# Altium PCB BLE112_Module.PcbDoc
Units mm, origin at the board's own origin, x right, y up, seen from the top; angles counter-clockwise.
Board outline 30.48 x 38.1 mm, 2 copper layers (Top Layer, Bottom Layer); 28 components, 33 nets, 125 pads, 20 vias.
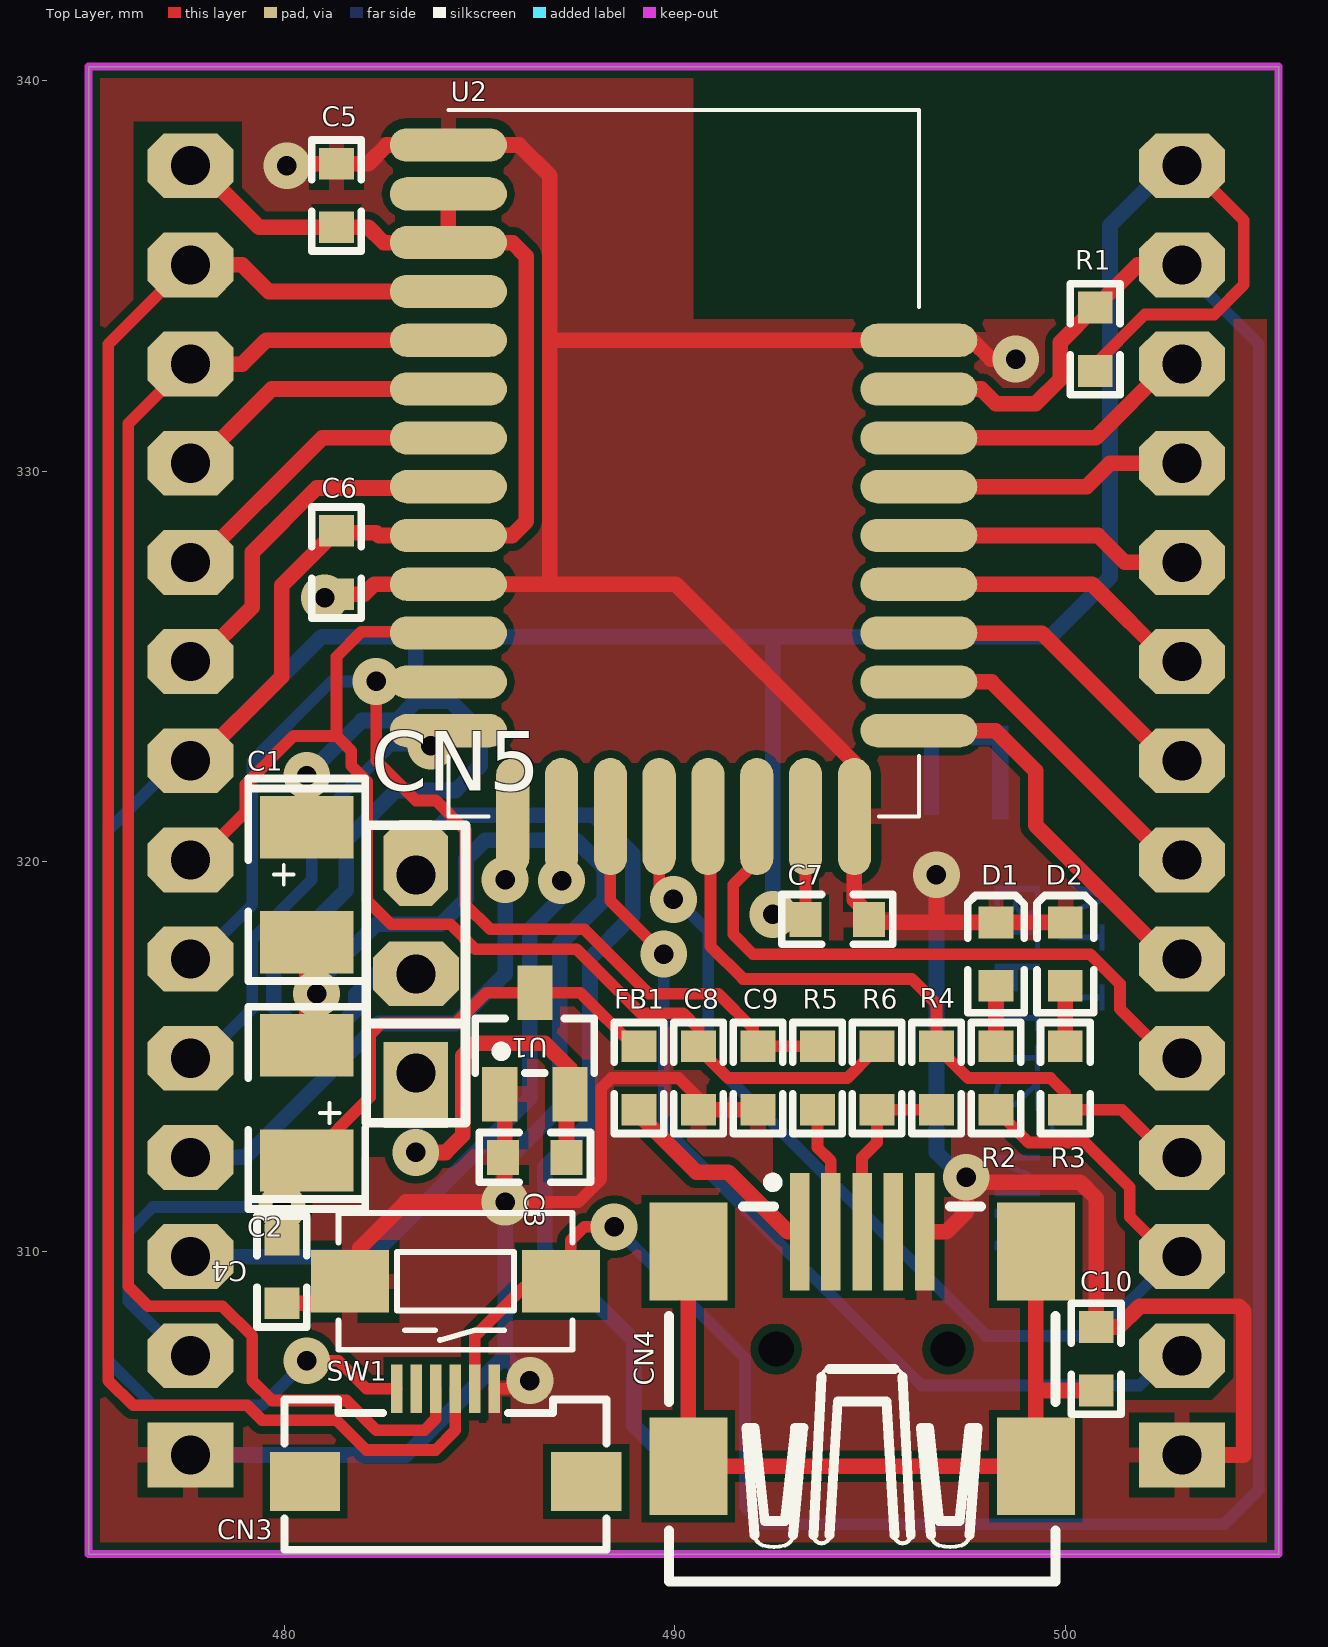
[diagram p0: Top Layer view]
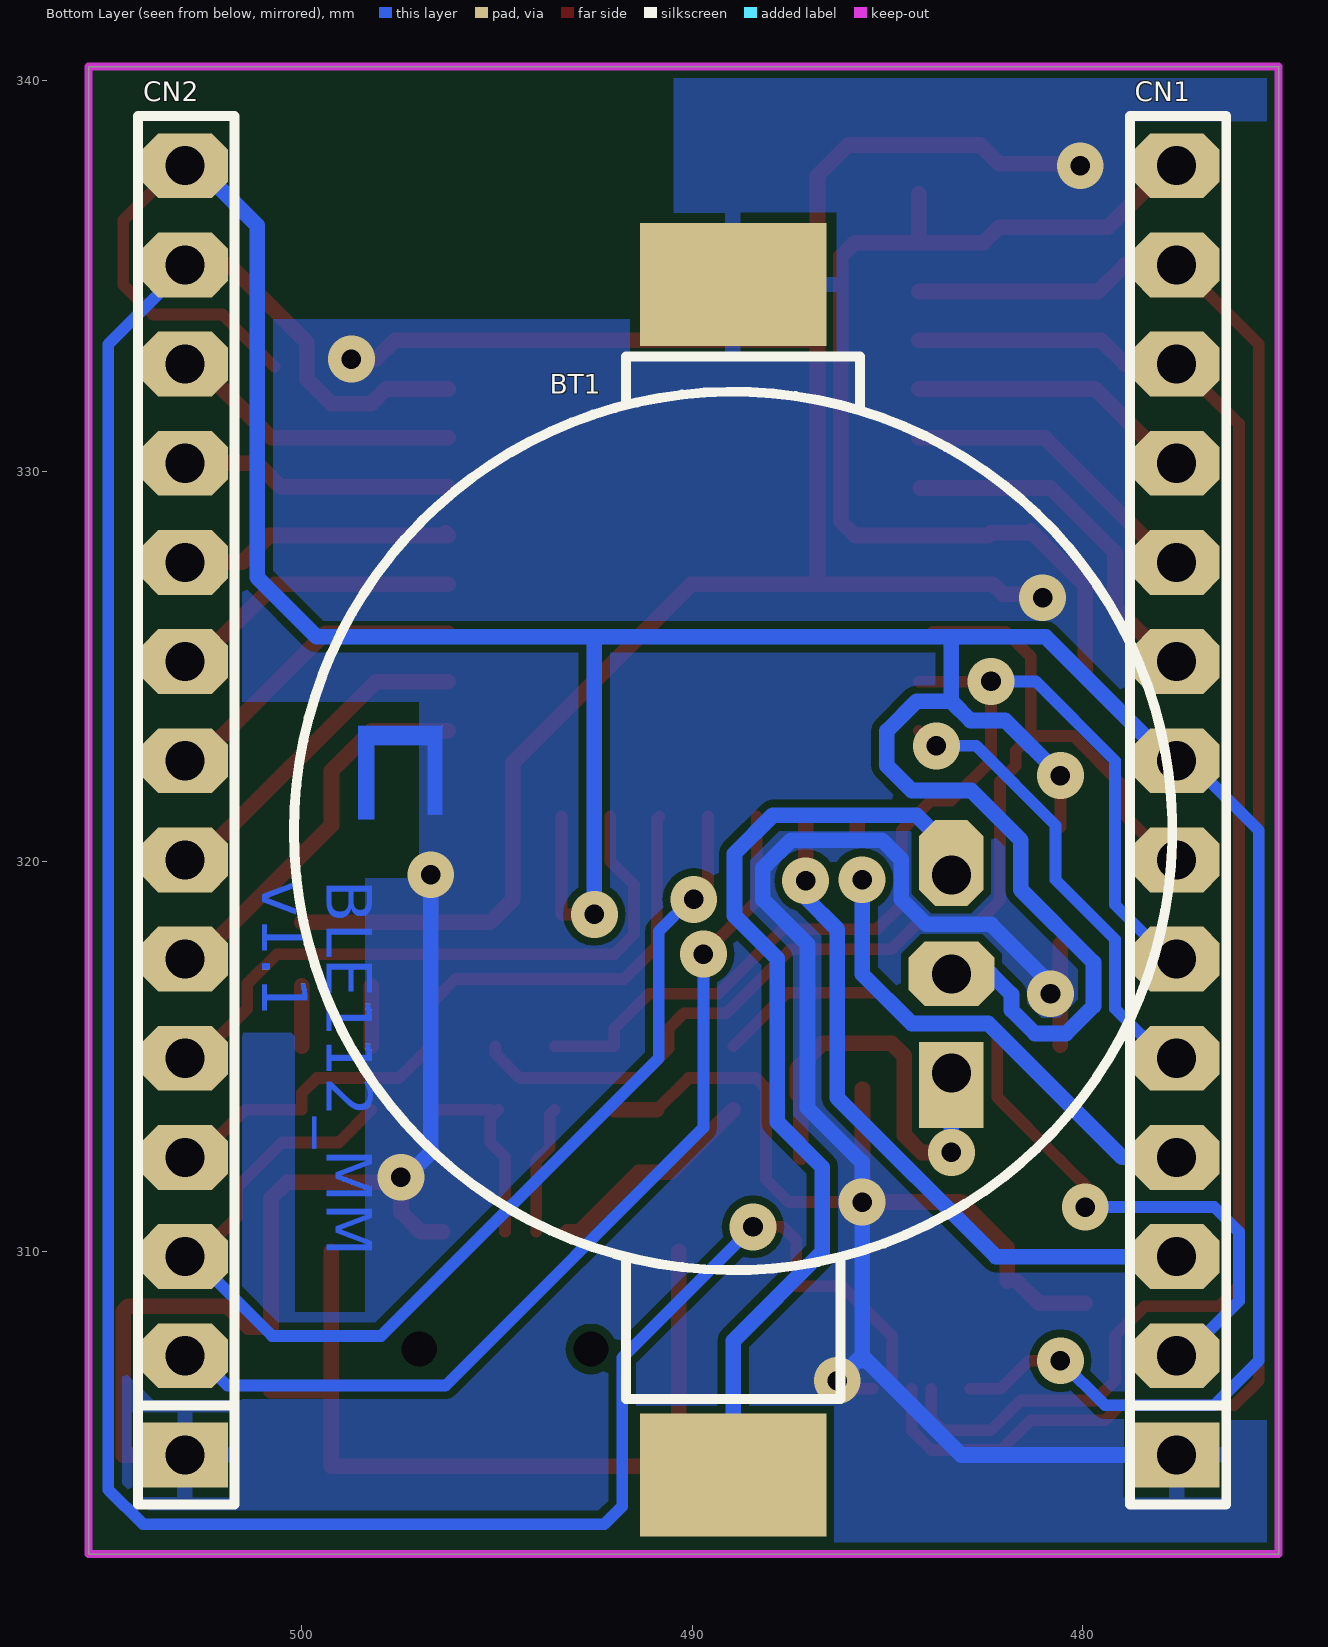
[diagram p1: Bottom Layer view, seen from below]
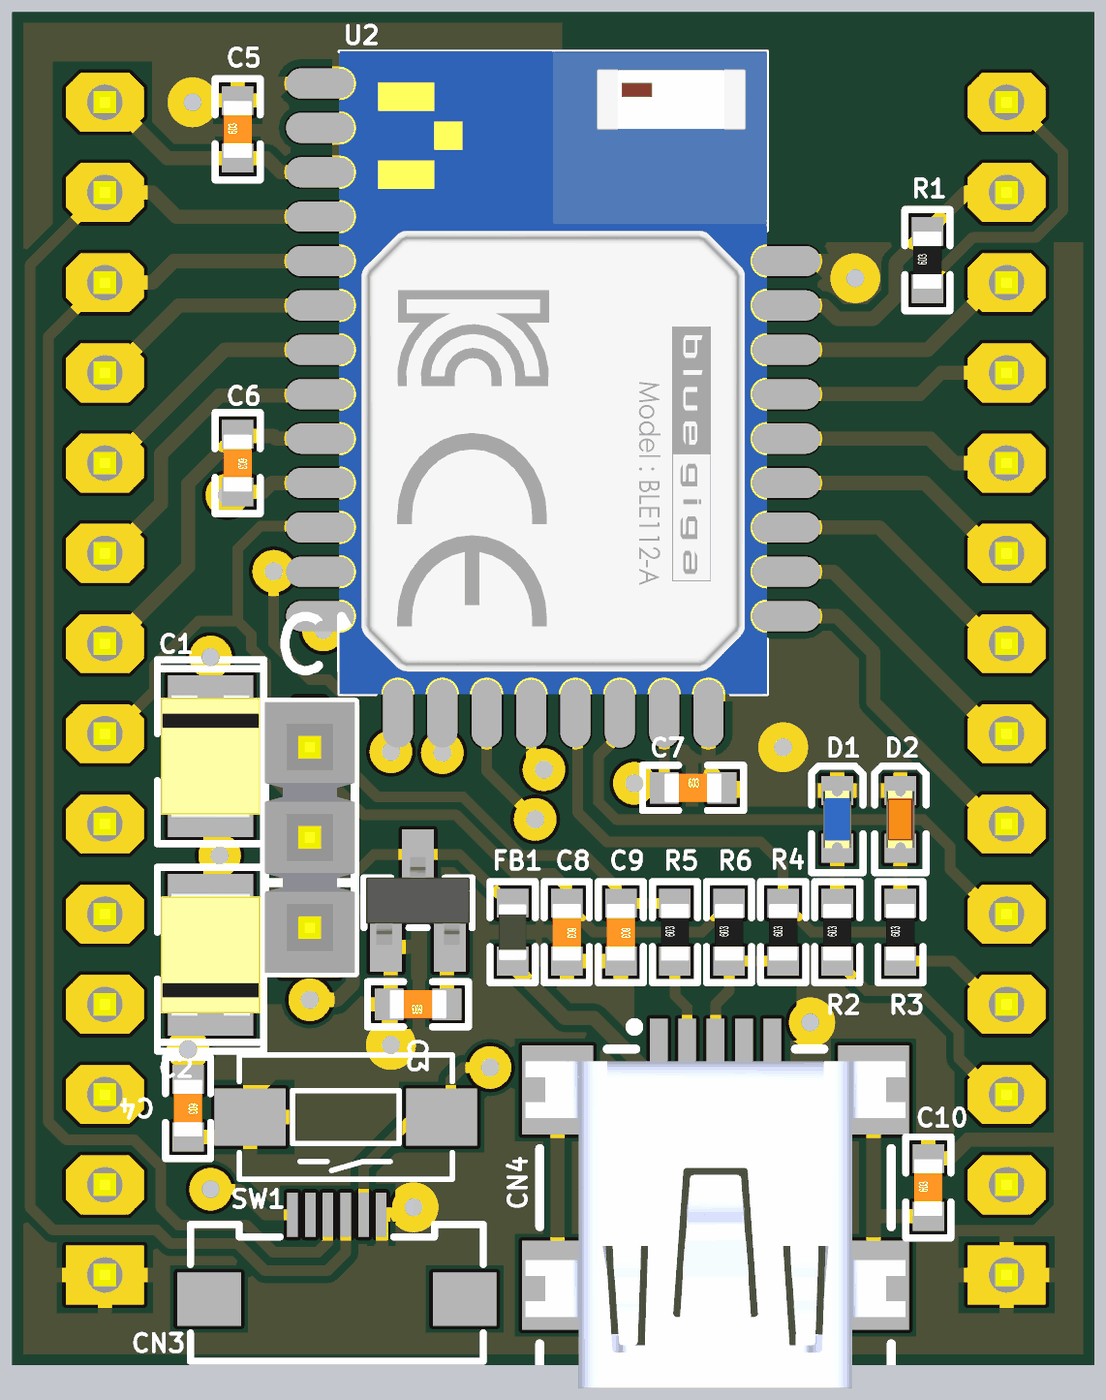
[diagram p2: 3D render of the assembled board from above, using the file's embedded part models]
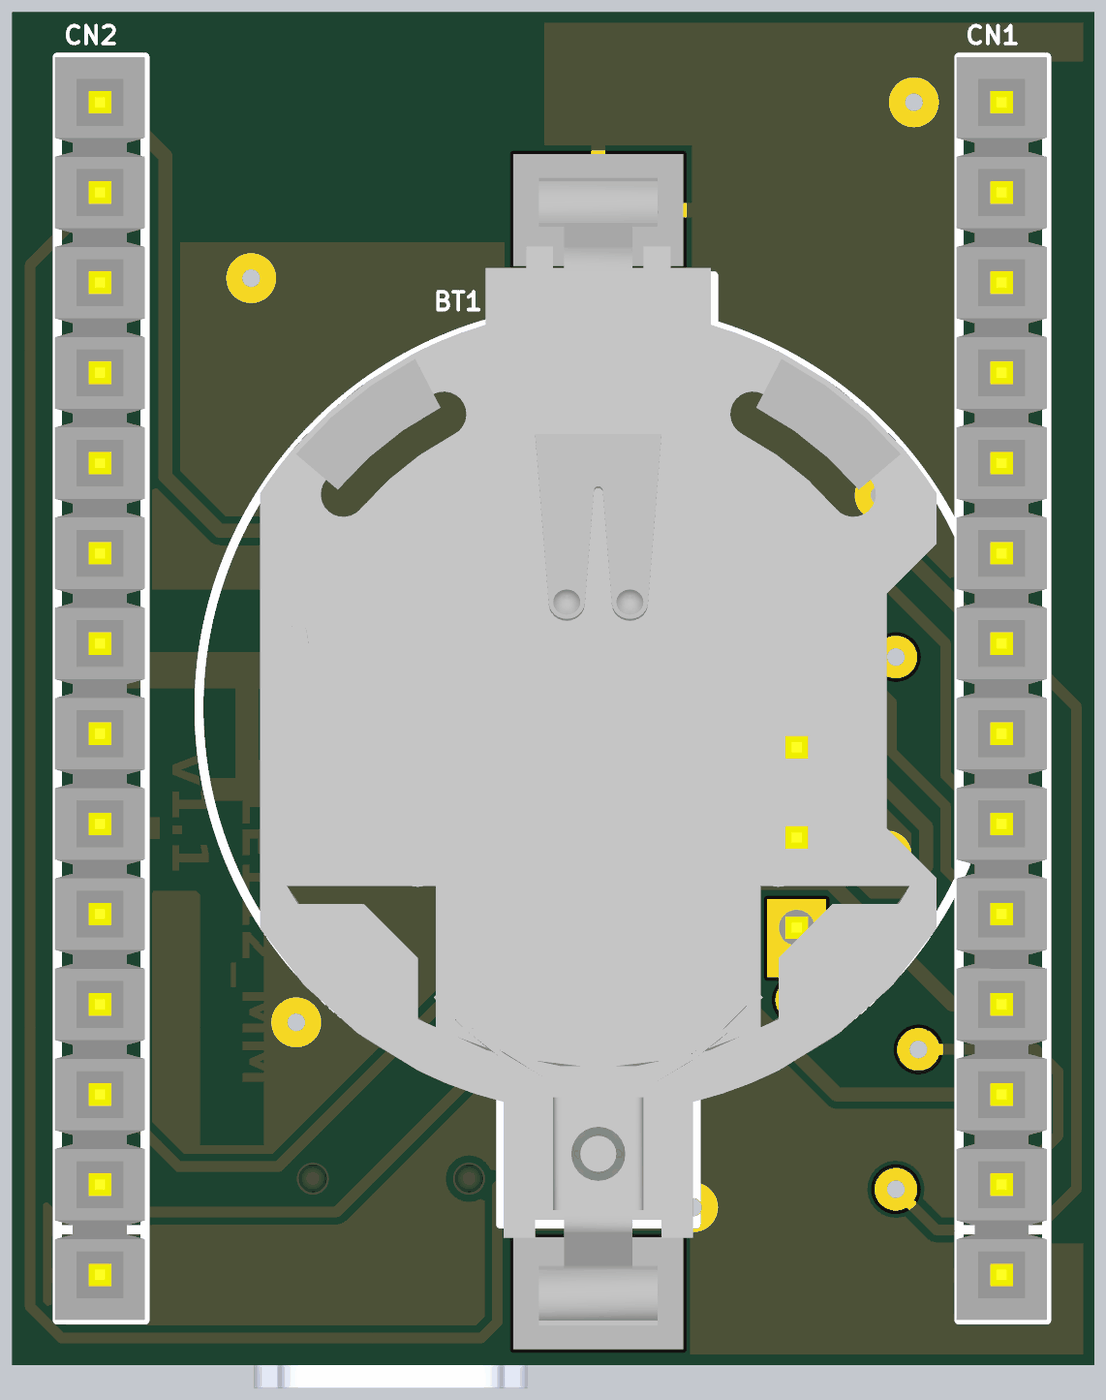
[diagram p3: 3D render of the assembled board from below, using the file's embedded part models]

## Layer stack, top to bottom
Top Solder: solder mask 0.0102, Solder Resist, Dk 3.5
Top Layer: signal copper 0.0356
Dielectric1: dielectric 0.32, FR-4, Dk 4.8
Bottom Layer: signal copper 0.0356
Bottom Solder: solder mask 0.0102, Solder Resist, Dk 3.5

## Board outline
474.98,302.26 505.46,302.26 505.46,340.36 474.98,340.36

## Design rules (kind name [scope] priority, off if disabled: settings)
Clearance [IsText vs InPolygon] p1: gap=0
Clearance Clearance_2 [All vs InPolygon] p2: gap=0.2
Clearance Clearance_1 [All] p3: gap=0.2
ComponentClearance [All] p1: gap=0 collisioncheckmode=3 verticalgap=0 showdistances=TRUE
FabricationTestPointUsage TestPointUsage [All] p1: valid=0 allowmultiple=FALSE
FabricationTestpoint Testpoint [All] p1: side=3 testpointundercomponent=TRUE minsize=1.016 maxsize=2.54 preferedsize=1.524 minholesize=0 maxholesize=1.016 preferedholesize=0.813 testpointgrid=0.025 allowsidetop=TRUE allowsidebottom=TRUE usegrid=TRUE gridtolerance=0
PolygonConnect [All vs IsVia] p1: connectstyle=Direct reliefconductorwidth=0.4 reliefentries=4 polygonreliefangle="90 Angle" airgapwidth=0.254
PolygonConnect PolygonConnect_1 [All] p2: connectstyle=Relief reliefconductorwidth=0.4 reliefentries=4 polygonreliefangle="90 Angle" airgapwidth=0.254
RoomDefinition BLE112_Module [InComponentClass('BLE112_Module')] p1: confinementstyle=ConfineIn formatcopy=TRUE lockcomponents=FALSE outline 408.026,268.529 774.268,268.529 774.268,358.978 408.026,358.978
RoutingVias [All] p1: holewidth=0.5 width=1.2 viastyle="Through Hole" minholewidth=0.5 minwidth=1.2 maxholewidth=0.5 maxwidth=1.2
SolderMaskExpansion [All] p1: expansion=0.102
Width [All] p1: maxlimit=1 minlimit=0.25 preferedwidth=0.5 minimp=50.000000 maximp=50.000000 favimp=50.000000
27 further rules are at their usual default settings.

## Components (designator, comment, footprint, x,y, rotation, side; value= is the part's Value field where it differs from the comment)
BT1 "796136-1 Battery Holder" 796136-1 488.95,319.532 r90 bottom locked
C1 "" SMDB 480.568,319.405 r90 top
C2 "" SMDB 480.568,313.817 r270 top
C3 "100nF" C0603 486.41,312.42 r180 top
C4 "100nF" C0603 479.933,309.499 r270 top
C5 "1uF" C0603 481.33,337.058 r90 top
C6 "1uF" C0603 481.33,327.66 r270 top
C7 "1uF" C0603 494.157,318.516 r0 top
C8 "47pF" C0603 490.601,314.452 r270 top
C9 "47pF" C0603 492.125,314.452 r270 top
C10 "10n" C0603 500.786,307.264 r90 top
CN1 "CN_14x1" GP_14x1 477.59,304.8 r90 bottom
CN2 "CN_14x1" GP_14x1 502.99,304.8 r90 bottom
CN3 "JOINT TECH F0500WR-S-06PT" F0500WR-S-06PT 484.124,305.308 r0 top
CN4 "USB MINI-B" "USB-MINI-B SMD" 494.792,302.26 r270 top
CN5 "CN_3x1" GP_3x1 483.362,314.579 r90 top
D1 "LED" LED0603B 498.221,317.627 r90 top
D2 "LED" LED0603R 499.999,317.627 r90 top
FB1 "600R, 1A" FB0603 489.077,314.452 r270 top
R1 "10k" R0603 500.761,333.375 r90 top
R2 "470R" R0603 498.221,314.452 r90 top
R3 "470R" R0603 499.999,314.452 r90 top
R4 "1k5" R0603 496.697,314.452 r90 top
R5 "33R" R0603 493.649,314.452 r90 top
R6 "33R" R0603 495.173,314.452 r90 top
SW1 "DTSM31N" DTSM-3 484.378,309.245 r180 top
U1 "MCP1700T-3002E/TT" SOT-23 486.41,315.341 r0 top
U2 "BLE112-A-v1" BLE112-X 490.22,330.2 r0 top

## Footprints (in the part's own frame and the unit in brackets; to place one, negate y for a bottom-side part, rotate by r counter-clockwise, add the part's x,y. Pads: shape width x height; smd on the part's side, far side on the other; paste and mask are expansions set on the pad)
796136-1 [mm] "Tyco Electronics 796136-1 CR2032 SMD Battery Holder"
  rect 3.15x4.78 smd: 1(-15.25,0) 2(15.25,0)
  silkscreen extent -13.3,-11.25 13.4,11.25, body extent -16.16,-9.52 16.16,9.53, height 6.52
BLE112-X [mm] "Bluegiga BLE112 Bluetooth Low Energy Single Mode Module"
  oval 3x0.85 smd mask+0.05: 1(-6.025,8.15) 2(-6.025,6.9) 3(-6.025,5.65) 4(-6.025,4.4) 5(-6.025,3.15) 6(-6.025,1.9) 7(-6.025,0.65) 8(-6.025,-0.6) 9(-6.025,-1.85) 10(-6.025,-3.1) 11(-6.025,-4.35) 12(-6.025,-5.6) 13(-6.025,-6.85) 22(6.025,-6.85) 23(6.025,-5.6) 24(6.025,-4.35) 25(6.025,-3.1) 26(6.025,-1.85) 27(6.025,-0.6) 28(6.025,0.65) 29(6.025,1.9) 30(6.025,3.15)
  oval 0.85x3 smd mask+0.05: 14(-4.375,-9.05) 15(-3.125,-9.05) 16(-1.875,-9.05) 17(-0.625,-9.05) 18(0.625,-9.05) 19(1.875,-9.05) 20(3.125,-9.05) 21(4.375,-9.05)
  silkscreen extent -6.02,-9.05 6.02,9.05, body extent -6.02,-9.05 6.03,9.05, height 2.3
C0603 [mil]
  rect 32x35 smd: 1(32,0) 2(-32,0)
  silkscreen extent -56,-25 56,25, body extent -31,-16 32,16, height 12
DTSM-3 [mm]
  rect 2x1.6 smd: 1(-2.7,0) 2(2.7,0)
  silkscreen extent -3,-1.75 3,1.75, body extent -3.6,-1.75 3.6,1.75, height 5
F0500WR-S-06PT [mm]
  rect 0.3x1.25 smd: 1(-1.25,1.188) 2(-0.75,1.188) 3(-0.25,1.188) 4(0.25,1.188) 5(0.75,1.188) 6(1.25,1.188)
  rect 1.8x1.5 smd: M1(-3.6,-1.187) M2(3.6,-1.187)
  silkscreen extent -4.13,-2.94 4.13,0.91, body extent -4.1,-2.9 4.1,1.4, height 2
FB0603 [mil]
  rect 32x35 smd: 1(32,0) 2(-32,0)
  silkscreen extent -56,-25 56,25, body extent -31,-16 32,16, height 35
GP_3x1 [mm]
  rect 2.2x1.651 hole 1 copper offset -0.3,0: 1(0,0)
  oct 1.651x2.2 hole 1: 2(2.54,0)
  oct 2.2x1.651 hole 1 copper offset 0.3,0: 3(5.08,0)
  silkscreen extent -1.27,-1.27 6.35,1.27, body extent -1.27,-1.27 6.35,1.27, height 8.38
GP_14x1 [mm]
  rect 1.66x2.2 hole 1: 1(0,0)
  oct 1.66x2.2 hole 1: 2(2.54,0) 3(5.08,0) 4(7.62,0) 5(10.16,0) 6(12.7,0) 7(15.24,0) 8(17.78,0) 9(20.32,0) 10(22.86,0) 11(25.4,0) 12(27.94,0) 13(30.48,0) 14(33.02,0)
  silkscreen extent -1.27,-1.27 34.29,1.2, body extent -1.27,-1.27 34.29,1.27, height 8.38
LED0603B [mil]
  rect 32x35 smd: 1(-32,0) 2(32,0)
  silkscreen extent -59,-29 59,29, body extent -32,-16 32,16, height 24
LED0603R [mil]
  rect 32x35 smd: 1(-32,0) 2(32,0)
  silkscreen extent -59,-29 59,29, body extent -32,-16 32,16, height 24
R0603 [mil]
  rect 32x35 smd: 1(32,0) 2(-32,0)
  silkscreen extent -56,-25 56,25, body extent -31,-16 32,16, height 12
SMDB [mm] "SMDB"
  rect 1.6x2.4 smd: 1(1.476,0) 2(-1.475,0)
  silkscreen extent -2.46,-1.5 2.72,1.5, body extent -1.75,-1.4 1.75,1.4, height 1.91
SOT-23 [mm]
  rect 0.9x1.4 smd: 1(-0.9,-1.3) 2(0.9,-1.3) 3(0,1.3)
  silkscreen extent -1.52,-0.76 1.52,0.64, body extent -1.46,-1.25 1.46,1.23, height 1
"USB-MINI-B SMD" [mm]
  rect 3x0.5 smd: 1(-8.255,-1.6) 2(-8.255,-0.8) 3(-8.255,0) 4(-8.255,0.8) 5(-8.255,1.6)
  rect 2.5x2 smd: 6(-7.75,4.45) 7(-2.25,4.45) 8(-7.75,-4.45) 9(-2.25,-4.45)
  round 0.6 hole 0.9 unplated: MH1(-5.25,2.2) MH2(-5.25,-2.2)
  silkscreen extent -9.65,-4.95 0.7,4.95, body extent -8.56,-5.35 0.64,5.35, height 3.95

## Part data
BT1: library part 796136-1, "Tyco Connectivity 796136-1 CR2032 Battery Holder"
C1 C2: library part "Cap Pol Tant", "Polarized Tantalum Capacitor"
C3 C4 C5 C6 C7 C8 C9 C10: library part Cap, "Capacitor"
CN3: "0.50mm Pitch FFC/FPC Connector, SMT, Right Angle, ZIF, Top Contact Style Receptacle, 6 Circuits"
CN4: "USB Mini-B Receptacle"
D1 D2: "Typical RED, GREEN, YELLOW, AMBER GaAs LED"
FB1: library part LCBA-601, "Ferrite Bead; Imp.@ 100MHz:600R; Mounting: SMD; 1A; Case: 0603"
R1 R2 R3 R4 R5 R6: library part Res, "Resistor"
SW1: "DIPTRONICS 6x3,5mm SMD Tactile SPST-NO Switch"
U1: "250mA, Low Voltage, Low Quiescent Current (1.6uA) LDO Voltage Regulator"
U2: "Bluetooth ®  low energy single mode module"

## Via types
v1: diameter 1.2, hole 0.5, Top Layer to Bottom Layer, 20 vias

## Nets (pads, with @x,y where several pads share a name; then routed paths per layer and width w, separated by ;. In a path a pad name is that pad's centre, name@x,y a point inside that pad or via, vN(x,y) a via of type N, cw(c..) or ccw(c..) an arc to the next point about the centre after c; other vN are vias at no path point)
3V3: C1.1 C5.2 C6.2 C7.2 CN1.8 CN1.14 CN2.14 CN3.1 CN5.2 R1.2 U2.2 U2.3 U2.9 U2.20 | length 134.9
  Top Layer w0.3: v1(480.568,307.213) 481.381,307.213 482.098,306.496 CN3.1 ; C1.1 v1(480.568,322.199) ; v1(492.506,318.643) 493.344,318.643 U2.20 ; R1.2@500.697,332.676 502.031,334.01 503.809,334.01 504.571,334.772 504.571,336.423 503.174,337.82 CN2.14@502.92,337.82
  Top Layer w0.4: CN1.8@477.52,322.58 477.774,322.58 479.933,324.739 479.933,327.076 C6.2 481.381,328.422 482.346,328.422 482.418,328.35 U2.9 485.83,328.35 486.191,328.711 486.191,335.496 485.837,335.85 U2.3 ; CN1.14@477.52,337.82 477.774,337.82 479.349,336.245 C5.2 482.143,336.245 482.538,335.85 U2.3 ; U2.2 U2.3
  Bottom Layer w0.3: CN1.8@477.774,322.58 477.266,322.58 475.488,320.802 475.488,307.213 476.631,306.07 479.425,306.07 v1(480.568,307.213)
  Bottom Layer w0.4: CN1.8@477.774,322.58 480.949,325.755 483.362,325.755 ; v1(480.568,322.199) 481.981,323.612 482.87,323.612 483.362,324.104 ; CN5.2 482.346,317.119 481.822,316.595 481.822,316.197 481.22,315.595 480.424,315.595 479.721,316.298 479.721,317.415 481.584,319.278 481.584,320.548 482.854,321.818 484.378,321.818 485.013,322.453 485.013,323.342 484.251,324.104 483.362,324.104 ; v1(492.506,318.643) 492.506,325.755 ; CN2.14@502.92,337.82 502.666,337.82 501.142,336.296 501.142,327.279 499.618,325.755 492.506,325.755 ; 483.362,324.104 483.362,325.755 ; 483.362,325.755 492.506,325.755
GND: BT1.2 C1.2 C2.2 C3.1 C4.1 C5.1 C6.1 C7.1 C8.1 C9.1 C10.1 CN1.1 CN2.1 CN3.6 CN4.5 D1.2 D2.2 SW1.2 U1.1 U2.1 U2.10 U2.21 U2.30 | length 139.4
  Top Layer w0.3: CN3.6 486.074,306.496 v1(486.283,306.705) ; v1@485.637,311.277 487.522,311.277 488.11,311.865 488.11,314.198 488.364,314.452 490.093,314.452 C8.1@490.906,313.639
  Top Layer w0.4: C4.1 481.119,308.686 SW1.2 ; v1(480.06,337.82) 480.111,337.871 C5.1 482.143,337.871 482.622,338.35 U2.1 486.007,338.35 486.791,337.566 486.791,333.375 ; C2.2 C1.2@480.568,317.881 ; v1@480.644,326.847 C6.1 482.041,326.847 482.294,327.1 U2.10 490.018,327.1 494.595,322.523 U2.21 494.595,319.018 495.173,318.44 496.697,318.44 ; SW1.2@481.932,309.245 481.932,310.101 483.108,311.277 485.394,311.277 v1@485.637,311.034 ; v1@485.637,311.277 U1.1@485.637,314.168 ; 486.791,327.1 486.791,333.375 ; C8.1@490.906,313.639 C9.1@491.998,313.639 ; CN4.5 496.951,310.515 497.459,311.023 497.459,311.785 497.586,311.912 v1(497.459,311.912) ; v1@496.697,319.405 496.697,318.44 ; v1@497.789,311.912 497.916,311.785 500.38,311.785 500.786,311.379 C10.1 501.371,308.077 501.904,308.61 504.444,308.61 504.571,308.483 504.571,304.8 CN2.1@502.92,304.8 ; v1@498.983,332.867 498.094,332.867 497.611,333.35 U2.30 486.816,333.35 486.791,333.375 ; D2.2 496.697,318.44 ; v1(497.459,311.912) 497.713,311.912 497.586,312.039 v1(497.459,311.912)
  Bottom Layer w0.4: CN1.1@477.52,304.8 483.108,304.8 485.648,307.34 v1(486.283,306.705) ; v1@480.885,316.928 482.346,318.389 483.997,318.389 484.648,319.04 484.648,320.056 485.14,320.548 487.466,320.548 487.508,320.507 487.51,320.507 488.096,319.921 488.096,319.919 488.188,319.826 488.188,319.024 487.045,317.881 487.045,313.69 485.648,312.293 v1(485.648,311.277) 485.648,307.213 ; v1@496.697,319.405 496.697,312.547 497.332,311.912 v1(497.459,311.912)
  other v1: 480.822,316.611 496.697,319.659 481.026,326.755 498.729,332.867
NetBT1_1: BT1.1 CN5.3 | length 25.3
  Bottom Layer w0.4: CN5.3 483.362,320.294 484.251,321.183 487.934,321.183 488.915,320.202 488.915,318.608 487.823,317.516 487.823,313.325 486.664,312.166 486.664,310.007 488.95,307.721 488.95,305.552 BT1.1@490.22,304.282
NetC3_2: C3.2 CN5.1 U1.2 | length 10.9
  Top Layer w0.4: v1(483.362,312.547) 484.124,312.547 484.568,312.991 484.568,315.024 484.886,315.341 486.664,315.341 487.31,314.695 U1.2 487.223,313.954 C3.2
  Bottom Layer w0.4: v1(483.362,312.547) CN5.1
NetC10_2: C10.2 CN4.6 CN4.7 CN4.8 CN4.9 | length 21.4
  Top Layer w0.4: CN4.8 CN4.9 CN4.7 499.242,306.451 ; CN4.6 499.242,306.451 ; C10.2 499.242,306.451
NetCN4_1: CN4.1 FB1.1 | length 5.5
  Top Layer w0.4: FB1.1@488.95,313.639 490.55,312.039 491.363,312.039 492.887,310.515 CN4.1
NetCN4_2: CN4.2 R5.2 | length 3.3
  Top Layer w0.3: R5.2@493.522,313.639 493.649,313.512 493.649,312.674 493.992,312.331 CN4.2
NetCN4_3: CN4.3 R4.2 R6.2 | length 4.9
  Top Layer w0.3: CN4.3 494.792,312.42 495.173,312.801 495.173,313.436 R6.2@494.97,313.639 ; R6.2 R4.2
NetD1_1: D1.1 R2.1 | length 1.5
  Top Layer w0.4: R2.1 D1.1
NetD2_1: D2.1 R3.1 | length 1.5
  Top Layer w0.4: R3.1 D2.1
P0_0: CN2.12 U2.28 | length 7.5
  Top Layer w0.4: U2.28 500.776,330.85 502.666,332.74 CN2.12@502.92,332.74
P0_1: CN2.11 U2.27 | length 6.9
  Top Layer w0.4: U2.27 500.542,329.6 501.142,330.2 CN2.11@502.92,330.2
P0_2: CN2.10 U2.26 | length 7.1
  Top Layer w0.4: U2.26@496.317,328.422 U2.26 500.833,328.35 501.523,327.66 CN2.10@502.92,327.66
P0_3: CN2.9 U2.25 | length 7.5
  Top Layer w0.4: U2.25 500.686,327.1 502.666,325.12 CN2.9@502.92,325.12
P0_4: CN2.8 U2.24 | length 8
  Top Layer w0.4: U2.24 499.396,325.85 502.666,322.58 CN2.8@502.92,322.58
P0_5: CN2.7 U2.23 | length 8.6
  Top Layer w0.4: U2.23 498.106,324.6 502.666,320.04 CN2.7@502.92,320.04
P0_6: CN2.6 U2.22 | length 9.9
  Top Layer w0.4: U2.22 498.213,323.35 499.237,322.326 499.237,320.929 502.666,317.5 CN2.6@502.92,317.5
P0_7: CN2.5 U2.19 | length 16.4
  Top Layer w0.3: U2.19 492.095,320.01 491.49,319.405 491.49,318.135 491.998,317.627 500.634,317.627 501.396,316.865 501.396,316.23 502.666,314.96 CN2.5@502.92,314.96
P1_0: CN2.4 R3.2 R4.1 U2.18 | length 18.5
  Top Layer w0.3: U2.18 490.908,321.087 490.908,318.114 490.908,317.828 491.744,316.992 496.062,316.992 496.697,316.357 R4.1 497.51,314.452 499.618,314.452 499.999,314.071 R3.2 501.447,313.639 502.666,312.42 CN2.4@502.92,312.42
P1_1: CN2.3 R2.2 U2.17 | length 29.7
  Top Layer w0.3: U2.17 489.595,319.39 v1(489.958,319.027) 489.89,319.027 489.839,319.078 v1@489.839,318.897 ; R2.2 499.059,312.801 500.507,312.801 501.65,311.658 501.65,310.896 502.666,309.88 CN2.3@502.92,309.88
  Bottom Layer w0.3: v1(489.958,319.027) 490.042,319.027 490.855,318.214 490.855,314.96 497.967,307.848 500.761,307.848 502.793,309.88 CN2.3
P1_2: CN2.2 U2.16 | length 24.8
  Top Layer w0.3: U2.16 488.345,318.994 v1(489.712,317.627)
  Bottom Layer w0.3: v1(489.712,317.627) 489.712,313.182 496.316,306.578 501.904,306.578 502.666,307.34 CN2.2@502.92,307.34
P1_3: CN1.3 U2.15 | length 18
  Top Layer w0.4: v1(487.096,319.507) U2.15
  Bottom Layer w0.4: CN1.3@477.52,309.88 CN1.3 482.219,309.88 486.283,313.944 486.283,318.262 487.096,319.075 v1(487.096,319.507)
P1_4: CN1.4 U2.14 | length 13.1
  Top Layer w0.4: U2.14@485.775,320.548 485.775,321.08 U2.14
  Bottom Layer w0.4: CN1.4@477.52,312.42 CN1.4 478.986,312.42 482.415,315.849 484.378,315.849 485.648,317.119 v1(485.648,319.532)
P1_5: CN1.5 U2.13 | length 12.4
  Top Layer w0.3: v1@483.461,322.616 U2.13
  Bottom Layer w0.3: CN1.5@477.52,314.96 477.901,314.96 479.171,316.23 479.171,318.008 480.695,319.532 480.695,320.929 482.727,322.961 v1(483.743,322.961)
P1_6: CN1.9 U2.8 | length 9.3
  Top Layer w0.3: CN1.9@477.52,325.12 CN1.9@477.774,325.12 ; U2.8@484.16,329.565 U2.8
  Top Layer w0.4: CN1.9@477.774,325.12 479.171,326.517 479.171,327.914 480.822,329.565 U2.8@484.16,329.565
P1_7: CN1.10 U2.7 | length 8
  Top Layer w0.3: CN1.10@477.52,327.66 CN1.10@477.774,327.66
  Top Layer w0.4: CN1.10@477.774,327.66 480.964,330.85 U2.7
P2_0: CN1.11 U2.6 | length 7.5
  Top Layer w0.3: CN1.11@477.52,330.2 CN1.11@477.774,330.2
  Top Layer w0.4: CN1.11@477.774,330.2 479.674,332.1 U2.6
P2_1: CN1.12 CN3.3 U2.5 | length 42.1
  Top Layer w0.3: CN1.12@477.52,332.74 475.996,331.216 475.996,309.118 476.504,308.61 478.409,308.61 479.171,307.848 479.171,306.705 479.679,306.197 481.584,306.197 482.346,305.435 483.583,305.435 483.874,305.726 CN3.3
  Top Layer w0.4: CN1.12@477.52,332.74 478.917,332.74 479.527,333.35 U2.5
P2_2: CN1.13 CN3.4 U2.4 | length 47.3
  Top Layer w0.3: CN1.13@477.52,335.28 475.488,333.248 475.488,306.705 476.123,306.07 479.044,306.07 479.425,305.689 481.33,305.689 482.092,304.927 483.87,304.927 484.374,305.431 CN3.4
  Top Layer w0.4: CN1.13@477.52,335.28 478.917,335.28 479.597,334.6 U2.4
RESET: CN2.13 CN3.5 R1.1 SW1.1 U2.29 | length 70.3
  Top Layer w0.3: CN3.5 484.874,307.836 486.156,309.118 487.332,309.118 487.332,310.294 487.68,310.642 ; 487.746,310.642 v1(488.442,310.642)
  Top Layer w0.4: U2.29 497.845,332.1 498.221,331.724 499.237,331.724 499.872,332.359 499.872,333.299 R1.1 501.853,335.28 CN2.13@502.92,335.28
  Bottom Layer w0.3: v1(488.442,310.642) 488.315,310.642 488.442,310.515 488.569,310.515 491.792,307.292 491.792,303.482 492.252,303.022 504.063,303.022 504.952,303.911 504.952,333.248 CN2.13@502.92,335.28
USB+: C8.2 CN1.7 R6.1 U2.11 | length 30.5
  Top Layer w0.3: CN1.7@477.52,320.04 477.774,320.04 478.993,321.259 478.993,321.97 480.238,323.215 481.33,323.215 ; U2.11@483.87,325.85 483.838,325.882 481.965,325.882 481.33,325.247 481.33,323.215 ; R6.1@495.046,315.265 495.046,315.087 494.411,314.452 491.363,314.452 490.601,315.214 490.601,315.722 490.212,316.111 489.124,316.111 487.481,317.754 484.886,317.754 484.251,318.389 482.727,318.389 482.118,318.998 482.118,322.046 481.711,322.453 481.711,322.834 481.33,323.215
USB-: C9.2 CN1.6 R5.1 U2.12 | length 29.4
  Top Layer w0.3: v1(482.346,324.612) 482.345,322.581 483.362,321.564 483.87,321.564 484.632,320.802 484.632,318.897 485.267,318.262 487.68,318.262 489.331,316.611 491.109,316.611 491.998,315.722 491.998,315.265 R5.1@493.522,315.265 ; v1@482.473,324.612 482.485,324.6 U2.12
  Bottom Layer w0.3: CN1.6@477.52,317.5 477.774,317.5 479.171,318.897 479.171,322.58 481.203,324.612 v1@482.473,324.612
VIN: C2.1 C4.2 CN1.2 FB1.2 U1.3 | length 21.1
  Top Layer w0.3: v1@479.655,311.428 C2.1 482.187,313.96 482.187,315.563 482.481,315.857 484.386,315.857 485.17,316.641 U1.3 487.574,316.641 FB1.2@488.95,315.265
  Bottom Layer w0.3: CN1.2 477.393,307.34 475.996,308.737 475.996,310.515 476.631,311.15 v1(479.933,311.15)
pads on no net: CN3.2 CN3.M1 CN3.M2 CN4.4 CN4.MH1 CN4.MH2

## Polygon pours and split planes (outlines as drawn)
GND on Top Layer "Top Layer-No Net" (solid, remove dead copper, pour order 3): 474.98,340.36 505.46,340.36 505.46,302.26 474.98,302.26
GND on Bottom Layer "Top Layer-No Net" (solid, remove dead copper, pour order 4): 474.98,340.36 505.46,340.36 505.46,302.26 474.98,302.26

## Keep-outs
Keep-Out Layer:
  the board outline again, w0.2

## Other copper
Top Layer:
  pour cut-out: 492.506,311.404 497.078,311.404 497.078,313.182 492.506,313.182
  pour cut-out: 490.474,340.36 490.474,333.883 505.46,333.883 505.46,340.36
  pour cut-out: 478.917,338.963 478.917,329.184 478.917,327.025 482.727,327.025 482.727,312.42 479.933,312.42 479.933,309.118 478.917,309.118 478.917,306.772 478.342,306.197 476.123,306.197 476.123,338.963
  pour cut-out: 504.317,333.883 504.317,306.772 503.742,306.197 501.523,306.197 501.523,333.883
Bottom Layer:
  pour cut-out: 490.474,340.36 490.474,333.883 505.46,333.883 505.46,340.36
  pour cut-out: 504.571,333.883 504.571,306.959 503.809,306.197 501.523,306.197 501.523,333.883
  pour cut-out: 476.25,305.689 475.234,305.689 475.234,309.626 475.361,321.183 474.98,335.534 474.98,338.963 476.123,338.963 478.917,338.963 478.917,305.689
  text "E" at 501.396,323.977 h15 r90
  text "BLE112_MM" at 499.745,319.532 h2 r90
  text "v1.1" at 501.396,319.532 h2 r90

## Silkscreen, mask and mechanical layers (free items; w line width, h text height)
Mechanical 4:
  lines w0.2: 490.474,333.883 490.474,340.36 505.46,340.36 505.46,333.883 490.474,333.883
Mechanical 16:
  lines w0.127: 358.9,260.26 363.98,260.26 ; 358.9,308.52 363.98,308.52 ; 358.9,356.78 363.98,356.78 ; 431.925,212 431.925,217.08 ; 431.925,399.96 431.925,405.04 ; 496.06,217.08 531.62,217.08 645.92,217.08 ; 504.95,212 504.95,217.08 ; 504.95,399.96 504.95,405.04 ; 526.007,217.105 526.032,217.08 ; 540.842,217.094 540.842,240.182 645.913,240.182 ; 540.868,232.664 645.887,232.664 ; 540.893,224.688 645.887,224.688 ; 559.823,217.094 559.823,224.688 ; 559.843,220.675 645.887,220.675 ; 577.975,212 577.975,217.08 ; 577.975,399.96 577.975,405.04 ; 591.363,217.145 591.363,224.663 ; 620.293,224.688 620.293,240.182 ; 635.318,232.664 635.318,240.179 ; 645.92,260.26 651,260.26 ; 645.92,308.52 651,308.52 ; 645.92,356.78 651,356.78 ; 645.92,217.08 645.92,242.353 645.92,399.96 363.98,399.96 363.98,217.08 645.92,217.08 ; 358.9,212 358.9,405.04 651,405.04 651,212 358.9,212
  text "1" at 395.146,401.611 h1.78
  text "2" at 467.79,401.611 h1.78
  text "3" at 540.942,401.611 h1.78
  text "4" at 613.84,401.611 h1.78
  text "A" at 360.805,378.599 h1.78
  text "A" at 647.825,378.599 h1.78
  text "B" at 360.805,330.542 h1.78
  text "B" at 647.825,330.542 h1.78
  text "C" at 360.805,282.028 h1.78
  text "C" at 647.825,282.028 h1.78
  text "PROJECT NAME:" at 541.757,238.176 h1.14
  text "REVISION:" at 621.207,238.176 h1.14
  text "A4" at 638.668,235.104 h2.29
  text "1.1" at 626.415,234.442 h1.78
  text "BLE112 Breakout Board Module" at 551.51,234.315 h2.54
  text "D" at 360.805,234.022 h1.78
  text "D" at 647.825,234.022 h1.78
  text "PROJECT NUMBER:" at 621.182,230.657 h1.14
  text "TITLE:" at 541.731,230.581 h1.14
  text "BLE112_MM" at 571.55,226.619 h2.16
  text "ONW-000" at 628.668,226.48 h1.78
  text "DATE:" at 541.858,222.479 h1.14
  text "P. Poryzala" at 609.626,221.995 h1.52
  text "1" at 571.045,221.92 h1.52
  text "DRAWN BY:" at 592.43,221.919 h1.52
  text "of" at 574.728,221.844 h1.52
  text "1" at 579.148,221.844 h1.52
  text "SHEET" at 561.266,221.818 h1.52
  text "DD-MM-YYYY" at 543.027,218.364 h1.52
  text "P. Poryzala" at 609.652,218.363 h1.52
  text "CHECKED BY:" at 592.405,218.236 h1.52
  text ".PCB_FILE_NAME_NO_PATH" at 561.165,218.211 h1.52
  text "1" at 395.146,213.651 h1.78
  text "2" at 467.79,213.651 h1.78
  text "3" at 540.942,213.651 h1.78
  text "4" at 613.84,213.651 h1.78

## Text inside footprints (layer, text, board x,y; h text height)
CN4: Mechanical 1 "PCB Edge" at 490.756,301.828 h0.25